# Altium PCB Power_SupplyPCB.PcbDoc
Units mil, origin at the board's own origin, x right, y up, seen from the top; angles counter-clockwise.
Board outline 6000 x 4000 mil, 2 copper layers (Top Layer, Bottom Layer); 28 components, 30 nets, 191 pads, 22 vias.
Unrouted connection lines stored in the file: 51.
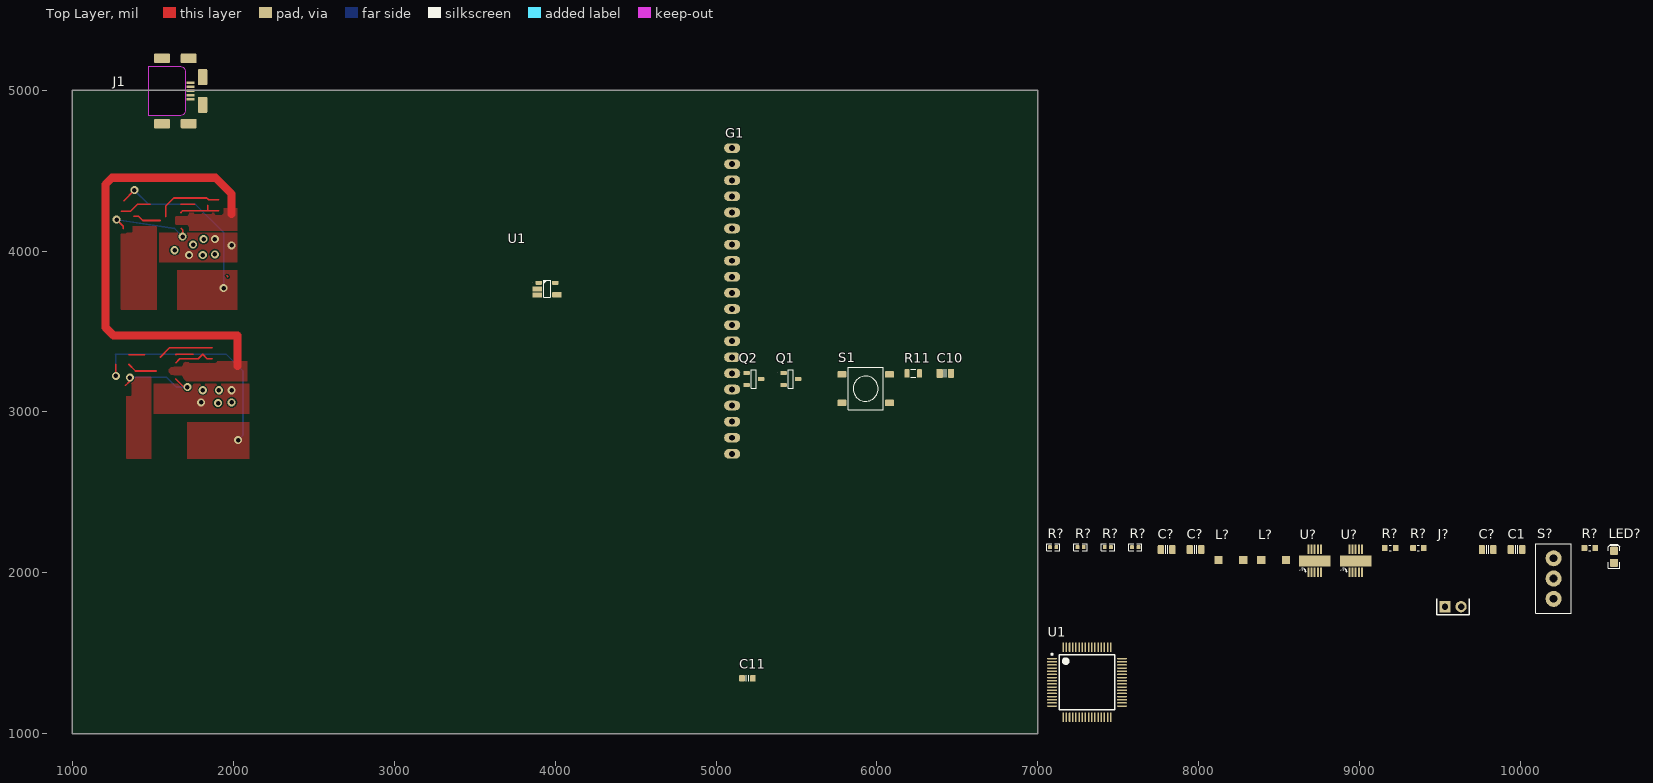
[diagram p0: Top Layer view]
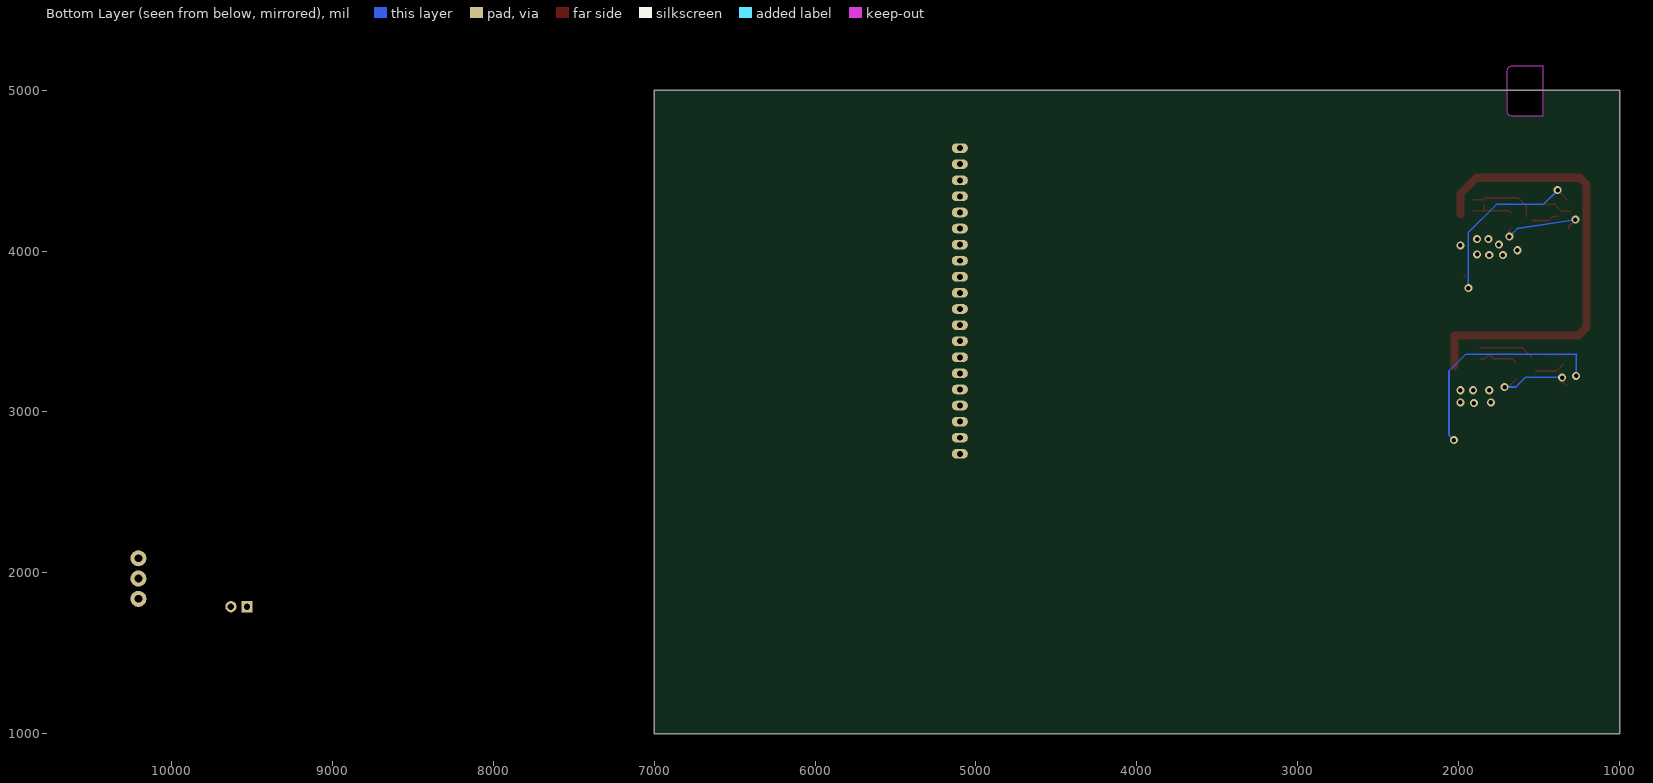
[diagram p1: Bottom Layer view, seen from below]

## Layer stack, top to bottom
Top Solder: solder mask 0.4, Solder Resist, Dk 3.5
Top Layer: signal copper 1.4
Dielectric 1: dielectric 12.6, FR-4, Dk 4.8
Bottom Layer: signal copper 1.4
Bottom Solder: solder mask 0.4, Solder Resist, Dk 3.5

## Board outline
1000,1000 7000,1000 7000,5000 1000,5000

## Design rules (kind name [scope] priority, off if disabled: settings)
Clearance "Polygon Different Net pads Clearance" [InPolygon vs IsPad] p1: gap=10
Clearance "Top Polygon  Top Trace Clearance" [(InPolygon AND OnLayer('Top Layer')) vs (OnLayer('Top Layer'))] p2: gap=7
Clearance "Non Poly Clearance" [(InNamedPolygon('Top Layer-No Net')) vs InPolygon] p3: gap=6
Clearance "Via Polygon Clearance" [InPolygon vs IsVia] p4: gap=8
Clearance [InNamedPolygon('GND') vs (OnLayer('Keep-Out Layer'))] p5: gap=20
PlaneClearance [(InNamedPolygon('Top Layer-No Net'))] p1: clearance=10
PolygonConnect [All] p1: connectstyle=Direct reliefconductorwidth=20 reliefentries=4 polygonreliefangle="45 Angle" airgapwidth=10
RoomDefinition Power_Supply [InComponentClass('Power_Supply')] p1: confinementstyle=ConfineIn formatcopy=TRUE lockcomponents=FALSE outline 7045,1060 10785,1060 10785,2290 7045,2290
RoomDefinition MCU [InComponentClass('MCU')] p2: confinementstyle=ConfineIn formatcopy=TRUE lockcomponents=FALSE outline 2650,1060 6890,1060 6890,4875 2650,4875
RoutingVias [All] p1: holewidth=28 width=50 viastyle="Through Hole" minholewidth=28 minwidth=50 maxholewidth=28 maxwidth=50
SolderMaskExpansion [All] p1: expansion=4
UnpouredPolygon [All] p1: allowunpoured=FALSE
Width [All] p1: maxlimit=100 minlimit=6 preferedwidth=10 minimp=50.000000 maximp=50.000000 favimp=50.000000
28 further rules are at their usual default settings.

## Classes and differential pairs
component class Power_Supply: C1 C? J1 J? L? LED? R? S? U1 U?
component class MCU: C10 C11 G1 Q1 Q2 R11 S1 U1

## Components (designator, comment, footprint, x,y, rotation, side; value= is the part's Value field where it differs from the comment)
C1 "approved sub OK" CAPC2012X135N 9975,2145 r0 top
C10 "approved sub OK" CAPC2012X135N 6425,3240 r0 top
C11 "approved sub OK" CAPC1608X90N 5195,1345 r0 top
C? "approved sub OK" CAPC2012X135N 9795,2145 r0 top
C? "approved sub OK" CAPC2012X135N 7800,2145 r0 top
C? "approved sub OK" CAPC2012X135N 7980,2145 r0 top
G1 "GLCD KS0108" "GLCD KS0108" 5100,2740 r90 top
J1 "USB Micro Type B" USB_Micro-B_Molex_SMD 1480,4995 r0 top
J? "Connector, jumper" JMP2_RA 9580,1790 r0 top
L? "10uH" TDK504015 8200,2080 r0 top
L? "10uH" TDK504015 8465,2080 r0 top
LED? "Red" LED-0805-K 10580,2100 r90 top
Q1 "Si2304DDS" SOT23-3 5465,3205 r0 top
Q2 "Si2304DDS" SOT23-3 5235,3205 r0 top
R11 "Thick Film" RESC2012X70N 6225,3240 r0 top
R? "Thick Film" RESC1608X55N 9190,2155 r0 top
R? "Thick Film" RESC1608X55N 9365,2155 r0 top
R? "Thick Film" RESC1608X55N 10430,2155 r0 top
R? "Thick Film" RESC1005X40N 7095,2160 r0 top
R? "Thick Film" RESC1005X40N 7435,2160 r0 top
R? "Thick Film" RESC1005X40N 7265,2160 r0 top
R? "Thick Film" RESC1005X40N 7605,2160 r0 top
S1 "TS-1143S-WP" TS-1143S 5930,3145 r0 top
S? "ON-ON" SWITCH_SPDT_SLIDER 10205,1965 r90 top
U1 "STM32F401RET6U" LQFP64_L 7305,1320 r0 top
U1 "Model Number" "SOT23-5 High Power" 3950,3765 r0 top
U? "STBB1-APUR" "DNF10-Hand Solder" 8720,2075 r0 top
U? "STBB1-APUR" "DNF10-Hand Solder" 8975,2075 r0 top

## Footprints (in the part's own frame and the unit in brackets; to place one, negate y for a bottom-side part, rotate by r counter-clockwise, add the part's x,y. Pads: shape width x height; smd on the part's side, far side on the other; paste and mask are expansions set on the pad)
CAPC1608X90N [mm] "Chip Capacitor, Body 1.6x0.8mm, EIA 0603, IPC Medium Density"
  round 0.254 on Mech15: 0(0,0)
  rrect25% 0.9x1 smd: 1(-0.85,0) 2(0.85,0)
  Top Layer pour cut-out: -0.6,0.5 -0.4,0.7 0.4,0.7 0.6,0.5 0.6,-0.5 0.4,-0.7 -0.4,-0.7 -0.6,-0.5
  silkscreen extent -0.18,-0.48 0.18,0.48, body extent -0.85,-0.45 0.85,0.45, height 0.89
CAPC2012X135N [mm] "Chip Capacitor, Body 2.0x1.2mm, EIA 0805, IPC Medium Density"
  round 0.254 on Mech15: 0(0,0)
  rrect25% 1x1.4 smd: 1(-0.9,0) 2(0.9,0)
  Top Layer pour cut-out: -0.675,0.7 -0.475,0.9 0.475,0.9 0.675,0.7 0.675,-0.7 0.475,-0.9 -0.475,-0.9 -0.675,-0.7
  silkscreen extent -0.15,-0.65 0.15,0.65, body extent -1.1,-0.72 1.1,0.73, height 1.34
"DNF10-Hand Solder" [mm]
  rect 0.3x1.5 smd: 1(-1,-1.825) 2(-0.5,-1.825) 3(0,-1.825) 4(0.5,-1.825) 5(1,-1.825) 6(1,1.825) 7(0.5,1.825) 8(0,1.825) 9(-0.5,1.825) 10(-1,1.825)
  rect 5x1.75 smd: 3(0,0)
  silkscreen extent -2.01,-1.75 -1.45,-1.18, body extent -1.5,-1.5 1.5,1.5, height 0.9
"GLCD KS0108" [mil]
  oval 60x100 hole 37: 1(0,0) 2(100,0) 3(200,0) 4(300,0) 5(400,0) 6(500,0) 7(600,0) 8(700,0) 9(800,0) 10(900,0) 11(1000,0) 12(1100,0) 13(1200,0) 14(1300,0) 15(1400,0) 16(1500,0) 17(1600,0) 18(1700,0) 19(1800,0) 20(1900,0)
JMP2_RA [mil] "2-pin RA jumper, 0.1\" .025 pins"
  rect 70x70 hole 40: 1(-50,0)
  round 70 hole 40: 2(50,0)
  silkscreen extent -100,-50 100,50, body extent -100,-13 100,394, height 98
LED-0805-K [mil]
  round 20 on Mech15: 0(0,0)
  rrect25% 50x50 smd: A(-37.5,0) K(37.5,0)
  Top Layer pour cut-out: -15,30 15,30 15,-30 -15,-30
  silkscreen extent -72,-35 77,35, body extent -39,-25 39,25, height 31
LQFP64_L [mm] "Thin QFP, 64-Leads, Body 10x10mm, Pitch 0.5mm, IPC High Density"
  oval 1.55x0.25 smd: 1(-5.525,3.75) 2(-5.525,3.25) 3(-5.525,2.75) 4(-5.525,2.25) 5(-5.525,1.75) 6(-5.525,1.25) 7(-5.525,0.75) 8(-5.525,0.25) 9(-5.525,-0.25) 10(-5.525,-0.75) 11(-5.525,-1.25) 12(-5.525,-1.75) 13(-5.525,-2.25) 14(-5.525,-2.75) 15(-5.525,-3.25) 16(-5.525,-3.75) 33(5.525,-3.75) 34(5.525,-3.25) 35(5.525,-2.75) 36(5.525,-2.25) 37(5.525,-1.75) 38(5.525,-1.25) 39(5.525,-0.75) 40(5.525,-0.25) 41(5.525,0.25) 42(5.525,0.75) 43(5.525,1.25) 44(5.525,1.75) 45(5.525,2.25) 46(5.525,2.75) 47(5.525,3.25) 48(5.525,3.75)
  oval 0.25x1.55 smd: 17(-3.75,-5.525) 18(-3.25,-5.525) 19(-2.75,-5.525) 20(-2.25,-5.525) 21(-1.75,-5.525) 22(-1.25,-5.525) 23(-0.75,-5.525) 24(-0.25,-5.525) 25(0.25,-5.525) 26(0.75,-5.525) 27(1.25,-5.525) 28(1.75,-5.525) 29(2.25,-5.525) 30(2.75,-5.525) 31(3.25,-5.525) 32(3.75,-5.525) 49(3.75,5.525) 50(3.25,5.525) 51(2.75,5.525) 52(2.25,5.525) 53(1.75,5.525) 54(1.25,5.525) 55(0.75,5.525) 56(0.25,5.525) 57(-0.25,5.525) 58(-0.75,5.525) 59(-1.25,5.525) 60(-1.75,5.525) 61(-2.25,5.525) 62(-2.75,5.525) 63(-3.25,5.525) 64(-3.75,5.525)
  silkscreen extent -5.65,-4.35 4.35,4.55, body extent -5,-5 5,5, height 1.6
RESC1005X40N [mm] "Chip Resistor, Body 1.0x0.5mm, EIA 0402, IPC Medium Density"
  round 0.2 on Mech15: 0(0,0)
  rrect20% 0.6x0.6 smd: 1(-0.5,0) 2(0.5,0)
  Top Layer pour cut-out: -0.325,0.375 -0.2,0.5 0.2,0.5 0.325,0.375 0.325,-0.375 0.2,-0.5 -0.2,-0.5 -0.325,-0.375
  silkscreen extent -1.05,-0.55 1.05,0.55, body extent -0.52,-0.27 0.53,0.28, height 0.4
RESC1608X55N [mm] "Chip Resistor, Body 1.6x0.8mm, EIA 0603, IPC Medium Density"
  round 0.254 on Mech15: 0(0,0)
  rrect25% 0.9x1 smd: 1(-0.85,0) 2(0.85,0)
  Top Layer pour cut-out: -0.6,0.5 -0.4,0.7 0.4,0.7 0.6,0.5 0.6,-0.5 0.4,-0.7 -0.4,-0.7 -0.6,-0.5
  silkscreen extent -0.15,-0.41 0.15,0.41, body extent -0.87,-0.47 0.88,0.48, height 0.54
RESC2012X70N [mm] "Chip Resistor, Body 2.0x1.2mm, EIA 0805, IPC Medium Density"
  round 0.254 on Mech15: 0(0,0)
  rrect25% 0.8x1.3 smd: 1(-1,0) 2(1,0)
  Top Layer pour cut-out: -0.725,0.65 -0.525,0.85 0.525,0.85 0.725,0.65 0.725,-0.65 0.525,-0.85 -0.525,-0.85 -0.725,-0.65
  silkscreen extent -0.38,-0.64 0.38,0.64, body extent -1.1,-0.67 1.1,0.68, height 0.69
SOT23-3 [mm] "SOT23, 3 pin"
  round 0.5 on Mech15: 0(0,0)
  rrect25% 1x0.6 smd: 1(-1.15,0.95) 2(-1.15,-0.95) 3(1.15,0)
  silkscreen extent -0.38,-1.45 0.38,1.45, body extent -1.4,-1.45 1.4,1.45, height 1.29
"SOT23-5 High Power" [mm]
  round 0.5 on Mech15: 0(0,0)
  rrect25% 1x0.6 smd: 1(-1.3,0.95) 5(1.3,0.95)
  rrect25% 1.5x0.8 smd: 2(-1.55,0) 3(-1.55,-0.975) 4(1.55,-0.925)
  silkscreen extent -0.51,-1.35 0.51,1.35, body extent -1.4,-1.45 1.4,1.45, height 1.44
SWITCH_SPDT_SLIDER [mil] "TE Connectivity SLS121PC04 SPDT slider"
  round 100 hole 48: 1(-126,0) 2(0,0) 3(126,0)
  silkscreen extent -217,-110 217,110, body extent -216,-110 217,110, height 394
TDK504015 [mm]
  rect 1.3x1.3 smd: 0(-1.95,0) 1(1.95,0)
  body extent -2.05,-2.55 2.05,2.55, height 1.5
TS-1143S [mm] "6.5x6.5mm SMD tact switch 4.3mm stem"
  round 0.508 on Mech15: 0(0,0)
  rrect25% 1.4x1 smd: 1(-3.75,2.25) 1(3.75,2.25) 2(-3.75,-2.25) 2(3.75,-2.25)
  silkscreen extent -2.79,-3.35 2.79,3.35, body extent -4,-3.25 4,3.25, height 4.3
USB_Micro-B_Molex_SMD [mm]
  round 0.508 on Mech15: 0(0,0)
  rrect20% 1.25x0.4 smd: 1(6.475,1.3) 2(6.475,0.65) 3(6.475,0) 4(6.475,-0.65) 5(6.475,-1.3)
  rrect20% 2.5x1.5 smd: SH(1.95,-5.15) SH(1.95,5.15) SH(6.15,-5.15) SH(6.15,5.15)
  rrect20% 1.5x2.5 smd: SH(8.35,-2.2) SH(8.35,2.2)
  Keep-Out Layer board cut-out: -0.127,3.9 4.8,3.9 5.106,3.839 5.366,3.666 5.539,3.406 5.6,3.1 5.6,3.1 5.6,-3.1 5.539,-3.406 5.366,-3.666 5.106,-3.839 4.8,-3.9 4.8,-3.9 -0.127,-3.9
  body extent -21.01,-5.5 8.7,5.5, height 4.1

## Part data
C1: library part CAPC_1u_0805_X7R_16V_10%, "Capacitor SMD Cer 1uF 10% 16V X7R 0805"
C10 C?: library part CAPC_4u7_0805, "Capacitor SMD Cer 4.7uF 10% 16V X5R 0805"
C11: library part CAPC_100n_0603_X7R_50V_10%, "Capacitor SMD Cer 100nF 10% 50V X7R 0603"
C? C?: library part CAPC_10u_0805_10V, "Capacitor SMD Cer 10uF 10% 10V X5R 0805"
J1: library part USB_Micro_TypeB, "Connector SMD USB Micro Type B middle mount"
J?: library part CONN_JMP_RA, "Connector Header 0.100in Right-angle single row"
L? L?: library part VLF504015MT-100M, "TDK VLF504015MT-100M  10uH 1.58A"
LED?: library part LED_SMD_Red_0805_6mcd, "LED 0805 SMD Red 6mcd 621nm"
Q1 Q2: library part MOSFET_Si2304DDS, "MOSFET SMD N-CH 30V 3.6A 1.7W SOT23-3"
R11: library part RES_10K_0805_1%, "Resistor SMD chip 10k Ohm 0.125W 1% 0805"
R? R?: library part RES_1K_0603_1%, "Resistor SMD chip 1k Ohm 0.1W 1% 0603"
R?: library part RES_330R_0603_5%, "Resistor SMD chip 330 Ohm 0.1W 5% 0603"
R? R?: library part RES_100K_0402_5%, "Resistor SMD chip 100k Ohm 0.063W 5% 0402"
R?: library part RES_100K_0402_5%, "Resistor SMD chip 560k Ohm 0.063W 5% 0402"
R?: library part RES_100K_0402_5%, "Resistor SMD chip 909k Ohm 0.063W 5% 0402"
S1: library part SW_SMD_PB_4.3mm, "Switch SMD Tact 4.3mm Stem"
S?: library part SW_THD_SPDT_On-On, "Switch THD vertical toggle SPDT"
U1: "STM32 ARM-based 32-bit MCU with 128 Kbytes Flash, 64-pin LQFP, Industrial Temperature"
U1: library part STC4054, "4.2 800mA Li-Ion Usb Charger"
U? U?: "STBB1-APUR DC-DC Buck Boost 2V-5.5V 1A"

## Via types
v1: diameter 50, hole 28, Top Layer to Bottom Layer, 22 vias

## Nets (pads, with @x,y where several pads share a name; then routed paths per layer and width w, separated by ;. In a path a pad name is that pad's centre, name@x,y a point inside that pad or via, vN(x,y) a via of type N, cw(c..) or ccw(c..) an arc to the next point about the centre after c; other vN are vias at no path point)
3.3V: R?.1@7415.31,2160 U?.1@8680.63,2003.15
5.0V: R?.1@7585.31,2160 U?.1@8935.63,2003.15
BAT: C?.1 J?.1 S?.1 U1.3@7087.48,1428.27 U?.5 U?.8
DB0: G1.7
DB1: G1.8
DB2: G1.9
DB3: G1.10
DB4: G1.11
DB5: G1.12
DB6: G1.13
DB7: G1.14
ENABLE: G1.6
ENABLEPWR: S?.2 U?.6@8759.37,2146.85
GND: C1.2 C10.2 C11.1 C?.2 G1.3 G1.4 J1.5 J1.SH J?.2 Q1.2 Q2.2 R11.1 R?.2@7114.69,2160 R?.2@7284.69,2160 R?.2@9398.46,2155 S1.1 S?.3 U1.2@7087.48,1447.95 U1.5@4001.18,3802.4 U?.3 U?.9
  other v1: 1800,3060 1990,3135 1725,3975 1990,4035 1885,4075
LCD_BKLIGHT: Q2.1
LCD_PWR: Q1.1
NetC1_1: C1.1 J1.1 LED?.A U1.4@7087.48,1408.58
NetC10_1: C10.1
NetC11_2: C11.2 S1.2
NetG1_1: G1.1 Q1.3
NetG1_20: G1.20 Q2.3
NetL?_0: L?.0@8388.23,2080 U?.4@8994.68,2003.15
NetL?_1: L?.1@8541.77,2080 U?.2@8955.32,2003.15
NetLED?_K: LED?.K R?.2@10463.46,2155
NetR11_2: R11.2
NetR?_1: R?.1@7245.31,2160 R?.2@7624.69,2160 U?.10@8935.63,2146.85
NetU?_6: U?.6@9014.37,2146.85
NetU?_7: U?.7@8994.68,2146.85
R/W: G1.5
RS: G1.17
pads on no net: C1.0 C10.0 C11.0 C?.0 G1.2 G1.15 G1.16 G1.18 G1.19 J1.0 J1.2 J1.3 J1.4 L?.0@8123.23,2080 L?.1@8276.77,2080 LED?.0 Q1.0 Q2.0 R11.0 R?.0 R?.1@7075.31,2160 R?.1@9156.54,2155 R?.1@9331.54,2155 R?.1@10396.54,2155 R?.2@7454.69,2160 R?.2@9223.46,2155 S1.0 U1.0 U1.1 U1.2@3888.98,3765 U1.3@3888.98,3726.61 U1.4@4011.02,3728.58 U1.5@7087.48,1388.9 U1.6 U1.7 U1.8 U1.9 U1.10 U1.11 U1.12 U1.13 U1.14 U1.15 U1.16 U1.17 U1.18 U1.19 U1.20 U1.21 U1.22 U1.23 U1.24 U1.25 U1.26 U1.27 U1.28 U1.29 U1.30 U1.31 U1.32 U1.33 U1.34 U1.35 U1.36 U1.37 U1.38 U1.39 U1.40 U1.41 U1.42 U1.43 U1.44 U1.45 U1.46 U1.47 U1.48 U1.49 U1.50 U1.51 U1.52 U1.53 U1.54 U1.55 U1.56 U1.57 U1.58 U1.59 U1.60 U1.61 U1.62 U1.63 U1.64 U?.2@8700.32,2003.15 U?.4@8739.68,2003.15 U?.7@8739.68,2146.85 U?.10@8680.63,2146.85
copper on no net: | length 8773.1
  Top Layer w10: v1(1270,3225) 1270,3296.54 ; v1(1275,4195) 1316.54,4153.46 1316.54,4140 ; 1305,4246.54 1360,4246.54 1403.46,4290 1483.54,4290 ; 1320,4313.46 v1(1385,4378.46) ; 1330,3165 1356.54,3191.54 v1(1356.54,3213.46) ; 1350,3296.54 1391.54,3255 1448.54,3255 1520,3255 ; 1351.54,3355 1448.54,3355 ; 1380,4216.54 1410,4216.54 1436.54,4190 1483.54,4190 1545,4190 ; 1545,3340 1603.46,3398.46 1870,3398.46 ; 1580,4215 1580,4280 1630,4330 1835,4330 1846.54,4318.46 1910,4318.46 ; 1641.46,3205 1691.46,3155 v1(1715,3155) ; 1641.46,3305 1666.46,3330 1728.1,3330 1728.35,3329.75 1771.65,3329.75 1771.9,3330 1781.54,3330 1810,3358.46 1836.93,3331.54 1870,3331.54 ; 1641.46,3355 1644.92,3358.46 1750,3358.46 ; 1674.49,4240 1686.02,4251.54 1846.54,4251.54 1910,4251.54 ; 1674.49,4290 1760,4290 ; 1676.46,4140 1685,4131.46 v1(1685,4090) ; 1840,4258.07 1840,4285 ; 1960,3845.94 1965.94,3840
  Top Layer w50: 1990,4230 1990,4355 1889.37,4455.63 1480,4455.63 1245.63,4455.63 1205,4415 1205,3525 1255,3475 2025,3475 2025,3285
  Bottom Layer w10: 1265,3360 1955,3360 2060,3255 2060,2855 v1(2030,2825) ; v1(1270,3225) 1270,3355 ; v1(1275,4195) 1635,4140 v1(1685,4090) ; v1(1356.54,3213.46) 1335,3215 1585,3215 1645,3155 v1(1715,3155) ; v1(1385,4378.46) 1473.46,4290 1765,4290 1940,4115 v1(1940,3770)
  other v1: 1905,3055 1990,3060 1810,3135 1910,3135 1810,3975 1885,3980 1635,4005 1750,4040 1815,4075

## Polygon pours and split planes (outlines as drawn)
no net on Top Layer "Top Layer-No Net" (solid, pour order 51): 1600,3190 2085,3190 2085,3315 1600,3315
no net on Top Layer "Top Layer-No Net" (solid, pour order 50): 1640,4125 2025,4125 2025,4265 1640,4265 1640,4125
GND on Top Layer "Top Layer-No Net" (solid, pour order 54): 2025,4115 1540,4115 1540,3930 2025,3930 2025,4115
no net on Top Layer "SW1" (solid, pour order 57): 1525,4155 1260,4155 1300,4115 1300,3635 1525,3635
no net on Top Layer "Top Layer-No Net" (solid, pour order 55): 1650,3870 1650,3635 2025,3635 2025,3880 1650,3880
GND on Top Layer "Top Layer-No Net" (solid, remove dead copper, pour order 56): 1505,3175 1505,2990 2100,2990 2100,3175
no net on Top Layer "SW2" (solid, remove dead copper, pour order 52): 1490,3220 1335,3220 1335,2710 1490,2710
no net on Top Layer "Top Layer-No Net" (solid, remove dead copper, pour order 53): 1715,2935 1715,2710 2100,2710 2100,2935
no net on Keep-Out Layer "SW2K" (solid, remove dead copper, shelved, pour order 37): 1490,3220 1335,3220 1335,2710 1490,2710

## Other copper
Bottom Layer:
  pour cut-out: 1825,4770 1700,4645 1605,4645 1605,4740 1565,4780

## Text inside footprints (layer, text, board x,y; h text height)
U?: Top Overlay "1" at 8904.13,2008.07 h19.68 r90
U?: Top Overlay "1" at 8649.13,2008.07 h19.68 r90